# Altium PCB SPARK_Controller.PcbDoc
Units mm, origin at the board's own origin, x right, y up, seen from the top; angles counter-clockwise.
Board outline 172.59 x 104.39 mm, 2 copper layers (Top Layer, Bottom Layer); 135 components, 114 nets, 419 pads, 0 vias.
Unrouted connection lines stored in the file: 281.
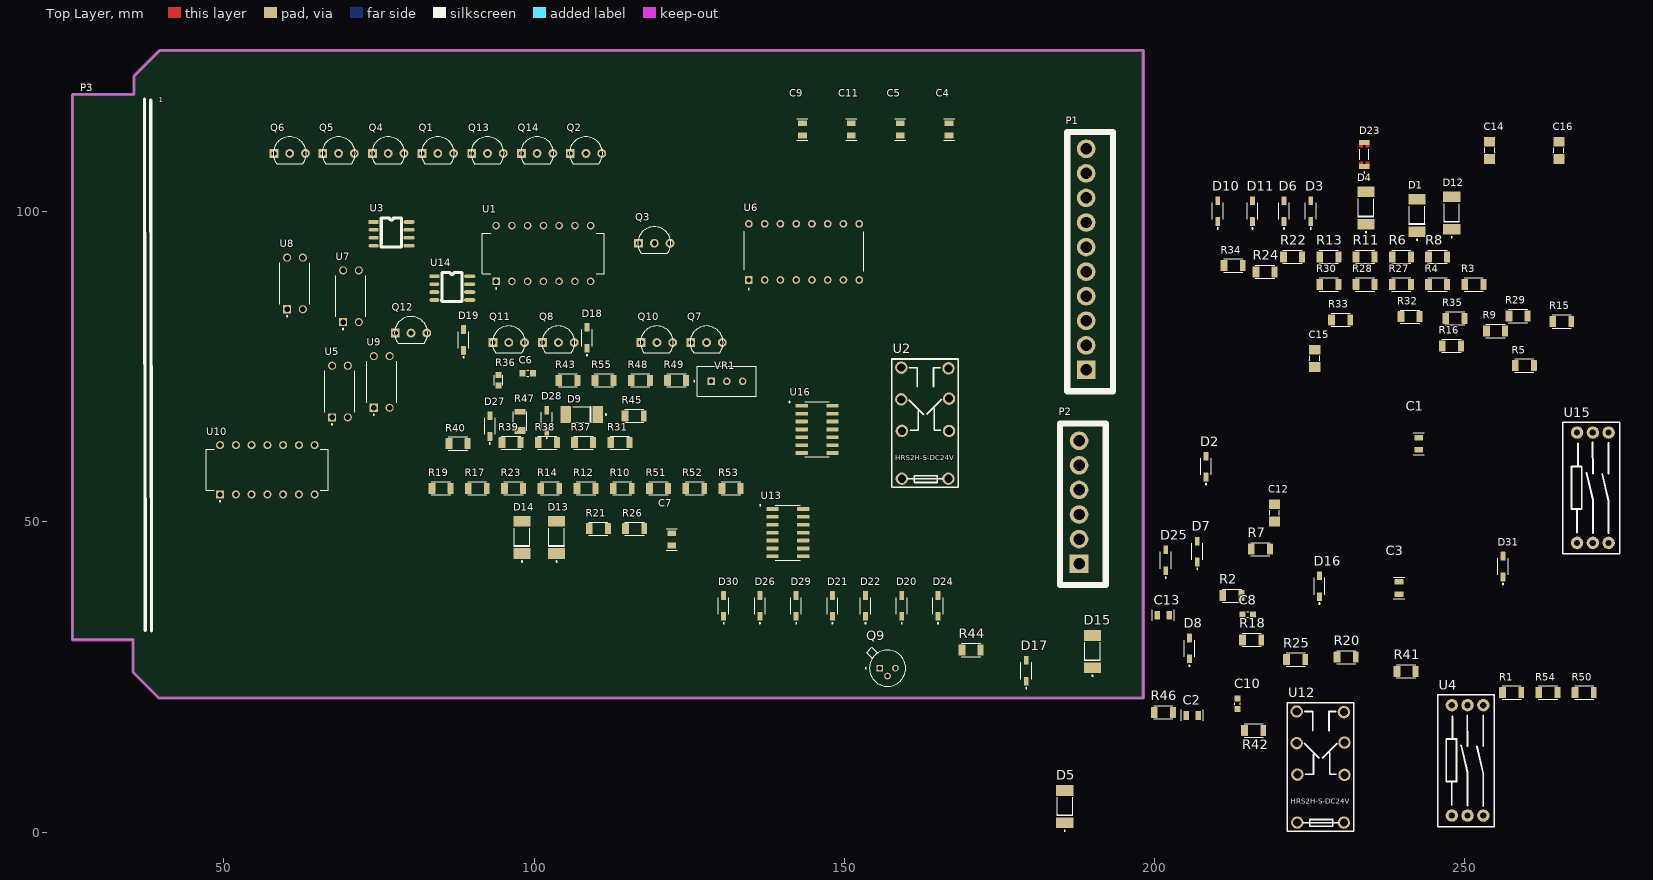
[diagram p0: Top Layer view]
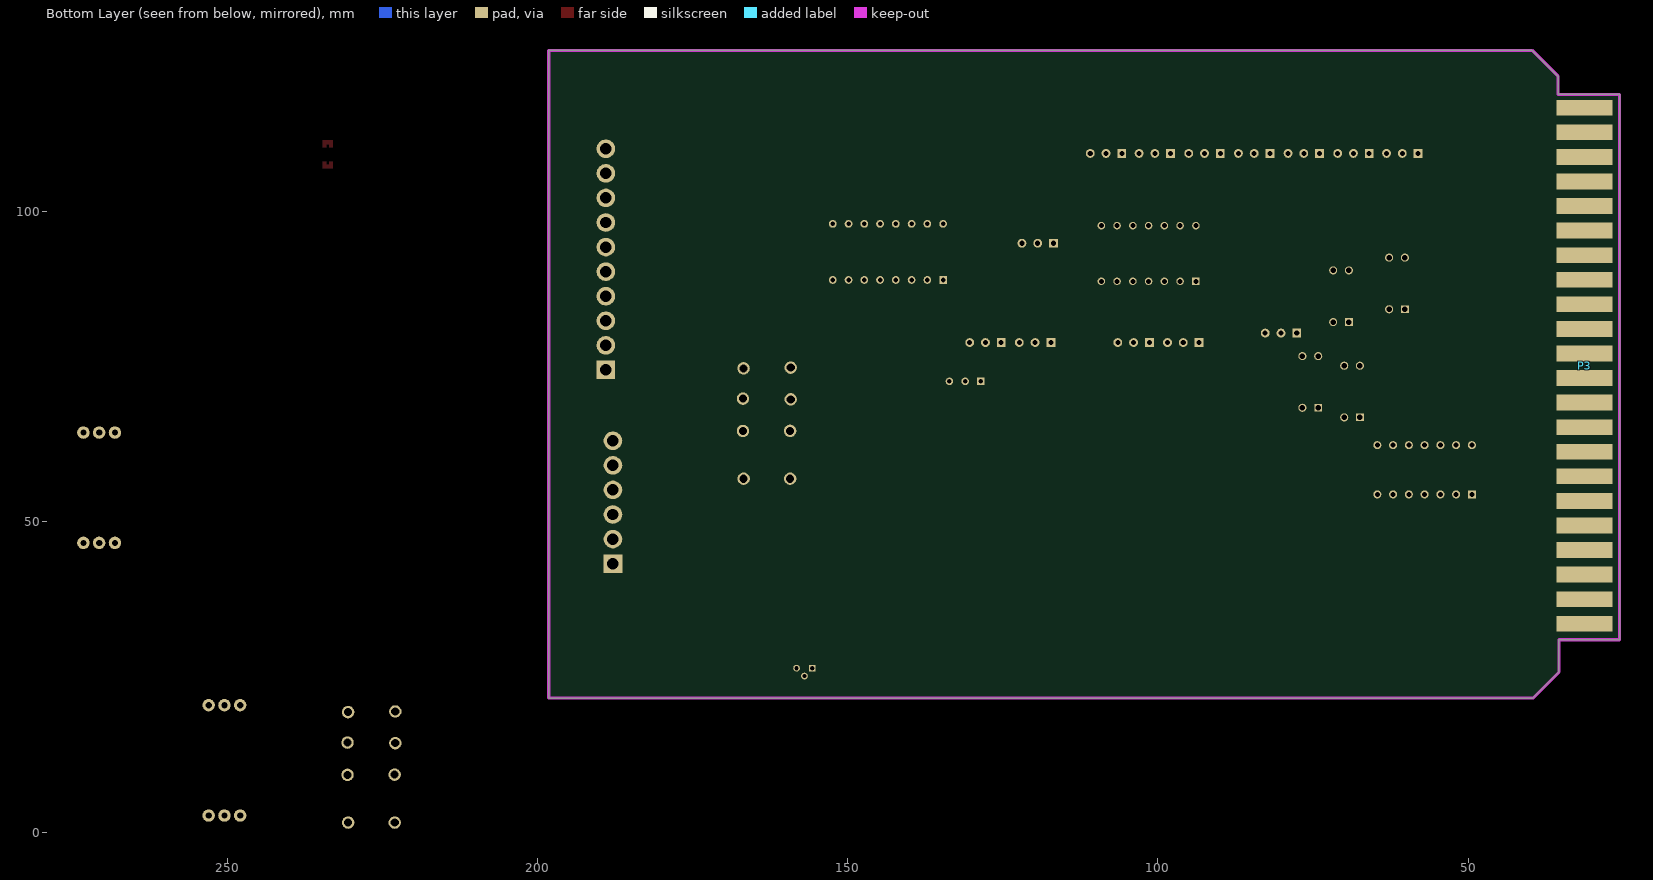
[diagram p1: Bottom Layer view, seen from below]

## Layer stack, top to bottom
Top Solder: solder mask 0.0102, Solder Resist, Dk 3.5
Top Layer: signal copper 0.0356
Dielectric 1: dielectric 0.32, FR-4, Dk 4.8
Bottom Layer: signal copper 0.0356
Bottom Solder: solder mask 0.0102, Solder Resist, Dk 3.5

## Board outline
25.59,30.988 25.59,118.872 35.496,118.872 35.496,121.793 39.688,125.984 198.183,125.984 198.183,21.59 39.56,21.59 35.369,25.781 35.369,30.988

## Design rules (kind name [scope] priority, off if disabled: settings)
Clearance [All] p1: gap=0.254 ignorepadtopadclearanceinfootprint=FALSE except(0: Arc-Hole Track-Hole SMDPad-Hole THPad-Hole Via-Hole Fill-Hole Poly-Hole Region-Hole Text-Hole)
PolygonConnect [All] p1: connectstyle=Relief reliefconductorwidth=0.254 reliefentries=4 polygonreliefangle="90 Angle" airgapwidth=0.254
RoutingVias [All] p1: holewidth=0.711 width=1.27 viastyle="Through Hole" minholewidth=0.711 minwidth=1.27 maxholewidth=0.711 maxwidth=1.27
SolderMaskExpansion [All] p1: expansion=0.102 istentingtop=FALSE
Width [All] p1: maxlimit=0.254 minlimit=0.254 preferedwidth=0.254
30 further rules are at their usual default settings.

## Components (designator, comment, footprint, x,y, rotation, side; value= is the part's Value field where it differs from the comment)
C1 "100nF" Cap0805 243.459,60.833 r90 top
C2 "100nF" Cap0805 204.343,17.907 r0 top
C3 "100nF" Cap0805 240.284,37.592 r90 top
C4 "100nF" Cap0805 167.767,111.506 r90 top
C5 "100nF" Cap0805 159.893,111.506 r90 top
C6 "10uF" Cap0603 98.97,73.942 r0 top
C7 "1nF" Cap0805 123.063,45.419 r90 top
C8 "47pF" Cap0603 215.011,35.052 r0 top
C9 "100nF" Cap0805 144.145,111.506 r90 top
C10 "22pF" Cap0603 213.36,20.701 r90 top
C11 "100nF" Cap0805 152.019,111.506 r90 top
C12 "10uF" Cap1206 219.329,51.435 r90 top
C13 "10uF" Cap0805 199.644,34.036 r0 top
C14 "10uF" Cap1206 254,109.855 r90 top
C15 "10uF" Cap1206 225.806,76.33 r90 top
C16 "10uF" Cap1206 265.176,109.855 r90 top
D1 "ZM" Melf 242.316,99.381 r90 top
D2 "1N4148" SOD-123 208.28,58.899 r90 top
D3 "1N4148" SOD-123 225.171,100.076 r90 top
D4 "ZM" Melf 234.061,100.584 r90 top
D5 "ZM" Melf 185.547,4.1 r90 top
D6 "1N4148" SOD-123 220.853,100.076 r90 top
D7 "1N4148" SOD-123 206.883,45.212 r90 top
D8 "1N4148" SOD-123 205.613,29.591 r90 top
D9 "ZM" Melf 107.696,67.31 r180 top
D10 "1N4148" SOD-123 210.185,100.076 r90 top
D11 "1N4148" SOD-123 215.773,100.076 r90 top
D12 "ZM" Melf 247.904,99.762 r90 top
D13 "ZM" Melf 103.632,47.498 r90 top
D14 "ZM" Melf 98.044,47.498 r90 top
D15 "ZM" Melf 189.992,29.083 r90 top
D16 "1N4148" SOD-123 226.568,39.624 r90 top
D17 "1N4148" SOD-123 179.324,26.006 r90 top
D18 "1N4148" SOD-123 108.524,79.657 r90 top
D19 "1N4148" SOD-123 88.646,79.305 r90 top
D20 "1N4148" SOD-123 159.258,36.449 r90 top
D21 "1N4148" SOD-123 148.082,36.449 r90 top
D22 "1N4148" SOD-123 153.416,36.449 r90 top
D23 "ZMM" MINIMELF 233.807,109.22 r90 top
D24 "1N4148" SOD-123 165.1,36.449 r90 top
D25 "1N4148" SOD-123 201.803,43.815 r90 top
D26 "1N4148" SOD-123 136.398,36.449 r90 top
D27 "1N4148" SOD-123 92.874,65.433 r90 top
D28 "1N4148" SOD-123 102.047,66.322 r90 top
D29 "1N4148" SOD-123 142.24,36.449 r90 top
D30 "1N4148" SOD-123 130.556,36.449 r90 top
D31 "1N4148" SOD-123 256.159,42.799 r90 top
P1 "PWR_HDR_10P" PWR_HDR_10P 188.976,74.48 r90 top
P2 "PWR_HDR_6P" PWR_HDR_6P 187.833,43.261 r90 top
P3 "PCI" PCI 31.242,116.735 r0 top
Q1 "BC337" TO92 84.492,109.375 r0 top
Q2 "BC337" TO92 108.368,109.375 r0 top
Q3 "BC337" TO92 119.38,94.897 r0 top
Q4 "BC337" TO92 76.491,109.375 r0 top
Q5 "BC337" TO92 68.49,109.375 r0 top
Q6 "BC337" TO92 60.616,109.375 r0 top
Q7 "BC337" TO92 127.799,78.895 r0 top
Q8 "BC337" TO92 103.923,78.895 r0 top
Q9 "BC177" TO-18 156.972,26.416 r0 top
Q10 "BC337" TO92 119.798,78.895 r0 top
Q11 "BC337" TO92 95.922,78.895 r0 top
Q12 "BC337" TO92 80.17,80.419 r0 top
Q13 "BC337" TO92 92.493,109.375 r0 top
Q14 "BC337" TO92 100.494,109.375 r0 top
R1 "4.7K" Res1206 257.556,22.479 r0 top value=1K
R2 "1.2K" Res1206 212.471,38.1 r0 top value=1K
R3 "4.7K" Res1206 251.46,88.265 r0 top value=1K
R4 "4.7K" Res1206 245.618,88.265 r0 top value=1K
R5 "6K8" Res1206 259.588,75.184 r0 top value=1K
R6 "330K" Res1206 239.776,92.71 r0 top value=1K
R7 "100K" Res1206 217.043,45.593 r0 top value=1K
R8 "3.9K" Res1206 245.618,92.71 r0 top value=1K
R9 "180K" Res1206 254.957,80.772 r0 top value=1K
R10 "10K" Res1206 114.21,55.4 r0 top value=1K
R11 "3.9K" Res1206 233.934,92.71 r0 top value=1K
R12 "10K" Res1206 108.368,55.4 r0 top value=1K
R13 "165k" Res1206 228.092,92.71 r0 top value=1K
R14 "10K" Res1206 102.526,55.4 r0 top value=1K
R15 "8.2k" Res1206 265.625,82.296 r0 top value=1K
R16 "6K8" Res1206 247.845,78.359 r0 top value=1K
R17 "10K" Res1206 90.842,55.4 r0 top value=1K
R18 "1.2K" Res1206 215.646,30.988 r0 top value=1K
R19 "10K" Res1206 85,55.4 r0 top value=1K
R20 "1k" Res1206 230.886,28.194 r0 top value=1K
R21 "27K" Res1206 110.363,48.895 r0 top value=1K
R22 "1k" Res1206 222.25,92.71 r0 top value=1K
R23 "10K" Res1206 96.684,55.4 r0 top value=1K
R24 "8.2k" Res1206 217.805,90.297 r0 top value=1K
R25 "1K8" Res1206 222.742,27.813 r0 top value=1K
R26 "1K8" Res1206 116.205,48.895 r0 top value=1K
R27 "33K" Res1206 239.776,88.265 r0 top value=1K
R28 "2K2" Res1206 233.934,88.265 r0 top value=1K
R29 "47k" Res1206 258.572,83.185 r0 top value=1K
R30 "2k7" Res1206 228.092,88.265 r0 top value=1K
R31 "1K5" Res1206 113.825,62.766 r0 top value=1K
R32 "47k" Res1206 241.173,83.058 r0 top value=1K
R33 "56k" Res1206 229.997,82.55 r0 top value=1K
R34 "18k" Res1206 212.666,91.313 r0 top value=1K
R35 "18k" Res1206 248.412,82.804 r0 top value=1K
R36 "100K" Res0603 94.271,72.799 r90 top value=1K
R37 "1K5" Res1206 107.983,62.766 r0 top value=1K
R38 "1K5" Res1206 102.141,62.766 r0 top value=1K
R39 "1K5" Res1206 96.299,62.766 r0 top value=1K
R40 "1K5" Res1206 87.757,62.611 r0 top value=1K
R41 "15k" Res1206 240.538,25.908 r0 top value=1K
R42 "1k" Res1206 215.968,16.383 r0 top value=1K
R43 "10K" Res1206 105.447,72.799 r0 top value=1K
R44 "100K" Res1206 170.434,29.337 r0 top value=1K
R45 "10K" Res1206 116.128,67.084 r0 top value=1K
R46 "22K" Res1206 201.422,19.304 r0 top value=1K
R47 "10K" Res1206 97.729,66.195 r90 top value=1K
R48 "10K" Res1206 117.131,72.799 r0 top value=1K
R49 "10K" Res1206 122.973,72.799 r0 top value=1K
R50 "4.7K" Res1206 269.24,22.479 r0 top value=1K
R51 "10K" Res1206 120.052,55.4 r0 top value=1K
R52 "10K" Res1206 125.894,55.4 r0 top value=1K
R53 "10K" Res1206 131.736,55.4 r0 top value=1K
R54 "390R" Res1206 263.398,22.479 r0 top value=1K
R55 "10K" Res1206 111.289,72.799 r0 top value=1K
U1 "HCF4093BE" HCF4093BE 101.506,93.246 r90 top
U2 "HRS2H-S-DC24V" HRS2H-S-DC24V 163.029,65.899 r90 top
U3 "OP07CD" SOP8 76.995,96.421 r0 top
U4 "OL-C-212H" ol-c-212H 247.904,2.667 r90 top
U5 "TLP521-1" TLP521-1 68.707,70.993 r90 top
U6 "CD4049UBE" PDIP-16 143.51,93.5 r90 top
U7 "TLP521-1" TLP521-1 70.485,86.36 r90 top
U8 "TLP521-1" TLP521-1 61.468,88.42 r90 top
U9 "TLP521-1" TLP521-1 75.438,72.545 r90 top
U10 "CD4011BE" PDIP-14 57.023,58.387 r90 top
U12 "HRS2H-S-DC24V" HRS2H-S-DC24V 226.762,10.484 r90 top
U13 "HEF4066BT" SOIC-14 140.908,48.26 r0 top
U14 "NE555D" SOP8 86.774,87.658 r0 top
U15 "OL-C-212H" ol-c-212H 268.097,46.609 r90 top
U16 "NE556D" SOIC-14 145.607,64.897 r0 top
VR1 "10K" Multi_Turn 131.064,72.644 r0 top

## Footprints (in the part's own frame and the unit in brackets; to place one, negate y for a bottom-side part, rotate by r counter-clockwise, add the part's x,y. Pads: shape width x height; smd on the part's side, far side on the other; paste and mask are expansions set on the pad)
Cap0603 [mm]
  rect 1x1 smd: 1(-0.85,0) 2(0.85,0)
  silkscreen extent -0.15,-0.45 0.15,0.45, body extent -0.8,-0.45 0.8,0.45, height 0.8
Cap0805 [mm]
  rect 0.9x1.4 smd: 1(0.762,0.889) 2(2.73,0.889)
  silkscreen extent 0,0 3.49,1.78, body extent 0.74,0.26 2.74,1.51, height 0.81
Cap1206 [mm]
  rect 1.6x1.8 smd: 1(-1.4,0) 2(1.4,0)
  silkscreen extent -0.4,-0.8 0.4,0.8, body extent -1.6,-0.8 1.6,0.8, height 0.94
HCF4093BE [mm]
  rect 1.2x1.2 hole 0.8: 1(-4.478,7.62)
  round 1.2 hole 0.8: 2(-4.478,5.08) 3(-4.478,2.54) 4(-4.478,0) 5(-4.478,-2.54) 6(-4.478,-5.08) 7(-4.478,-7.62) 8(4.478,-7.62) 9(4.478,-5.08) 10(4.478,-2.54) 11(4.478,0) 12(4.478,2.54) 13(4.478,5.08) 14(4.478,7.62)
  silkscreen extent -5.74,-9.84 3.3,9.84, body extent -5.51,-9.7 5.41,9.6, height 5.08
HRS2H-S-DC24V [mm]
  round 2 hole 1.3 paste+0 mask+0.051: 1(-8.952,-3.74) 2(-1.256,-3.849) 3(3.943,-3.849) 4(8.846,-3.75) 5(8.952,3.847) 6(3.844,3.849) 7(-1.236,3.75) 8(-8.952,3.76)
  silkscreen extent -10.36,-5.35 10.34,5.35
Melf [mm]
  rect 1.7x2.78 smd: A(2.6,0) C(-2.6,0)
  silkscreen extent -4,-1.23 1.5,1.23, body extent -2.7,-1.27 2.45,1.4, height 1.34
MINIMELF [mm]
  rect 0.8x1.65 smd: A(1.95,0) C(-1.95,0)
  Top Layer region: -1.15,0.25 -1.65,0.25 -1.65,-0.25 -1.15,-0.25 -1.15,-0.825 -2.24,-0.825 -2.24,0.825 -1.15,0.825
  Top Layer region: 2.25,-0.825 1.15,-0.825 1.15,-0.25 1.65,-0.25 1.65,0.25 1.15,0.25 1.15,0.825 2.25,0.825
  silkscreen extent -3.02,-0.75 0.83,0.75, body extent -1.73,-0.75 1.73,0.75, height 1.5
Multi_Turn [mm]
  rect 1.218x1.218 / inner round 1.218 / far side rect 1.218x1.218 hole 0.71: 1(-2.54,0)
  round 1.218 hole 0.71: 2(0,0) 3(2.54,0)
  silkscreen extent -5.35,-2.41 4.76,2.42, body extent -4.76,-2.41 4.76,2.42, height 11.55
ol-c-212H [mm]
  round 2 hole 1: 1(0,0) 2(17.78,0) 3(0,-2.54) 4(17.78,-2.54) 5(0,-5.08) 6(17.78,-5.08)
  silkscreen extent -1.78,-6.86 19.43,2.29
PCI [mm]
  rect 9x2.54 smd far side: 1(0,0) 2(0,-3.96) 3(0,-7.92) 4(0,-11.88) 5(0,-15.84) 6(0,-19.8) 7(0,-23.76) 8(0,-27.72) 9(0,-31.68) 10(0,-35.64) 11(0,-39.6) 12(0,-43.56) 13(0,-47.52) 14(0,-51.48) 15(0,-55.44) 16(0,-59.4) 17(0,-63.36) 18(0,-67.32) 19(0,-71.28) 20(0,-75.24) 21(0,-79.2) 22(0,-83.16)
  silkscreen extent 5.97,-84.33 7.11,1.4
PDIP-14 [mm]
  rect 1.3x1.3 hole 0.8: 1(-3.97,7.62)
  round 1.3 hole 0.8: 2(-3.97,5.08) 3(-3.97,2.54) 4(-3.97,0) 5(-3.97,-2.54) 6(-3.97,-5.08) 7(-3.97,-7.62) 8(3.97,-7.62) 9(3.97,-5.08) 10(3.97,-2.54) 11(3.97,0) 12(3.97,2.54) 13(3.97,5.08) 14(3.97,7.62)
  silkscreen extent -5.15,-9.84 3.3,9.84, body extent -4.13,-9.65 4.06,9.65, height 5.08
PDIP-16 [mm]
  rect 1.248x1.248 hole 0.74: 1(-4.52,8.89)
  round 1.248 hole 0.74: 2(-4.52,6.35) 3(-4.52,3.81) 4(-4.52,1.27) 5(-4.52,-1.27) 6(-4.52,-3.81) 7(-4.52,-6.35) 8(-4.52,-8.89) 9(4.52,-8.89) 10(4.52,-6.35) 11(4.52,-3.81) 12(4.52,-1.27) 13(4.52,1.27) 14(4.52,3.81) 15(4.52,6.35) 16(4.52,8.89)
  silkscreen extent -6.08,-9.65 3.32,9.65, body extent -5.42,-9.65 5.5,9.65, height 5.08
PWR_HDR_6P [mm]
  rect 3x3 hole 1.85: 1(0,0)
  round 3 hole 1.85: 2(3.96,0) 3(7.92,0) 4(11.88,0) 5(15.84,0) 6(19.8,0)
  silkscreen extent -3.43,-4.32 22.61,3.05
PWR_HDR_10P [mm]
  rect 3x3 hole 1.85: 1(0,0)
  round 3 hole 1.85: 2(3.96,0) 3(7.92,0) 4(11.88,0) 5(15.84,0) 6(19.8,0) 7(23.76,0) 8(27.72,0) 9(31.68,0) 10(35.64,0)
  silkscreen extent -3.43,-4.32 38.35,3.05
Res0603 [mm] "CHIP Resistor 1/10 WATT, 1.6x0.8mm, 0603, SMD (SolderMask Defined)"
  rrect20% 1x1.02 smd: 1(-0.85,0) 2(0.85,0)
  silkscreen extent -0.8,-0.69 0.8,0.69, body extent -0.85,-0.4 0.85,0.4, height 0.56
Res1206 [mm]
  rrect14% 1.09x1.77 smd: 1(-1.465,0)
  rrect14% 0.94x1.77 smd: 2(1.54,0)
  silkscreen extent -1.55,-1.06 1.55,1.06, body extent -1.6,-0.8 1.6,0.8, height 0.6
SOD-123 [mm]
  rrect18% 1.4x0.8 smd: A(1.68,0) C(-1.68,0)
  silkscreen extent -2.9,-0.85 1.35,0.85, body extent -1.82,-0.65 1.82,0.9, height 1.44
SOIC-14 [mm]
  rrect25% 1.97x0.6 smd: 1(-2.475,3.81) 2(-2.475,2.54) 3(-2.475,1.27) 4(-2.475,0) 5(-2.475,-1.27) 6(-2.475,-2.54) 7(-2.475,-3.81) 8(2.475,-3.81) 9(2.475,-2.54) 10(2.475,-1.27) 11(2.475,0) 12(2.475,1.27) 13(2.475,2.54) 14(2.475,3.81)
  silkscreen extent -4.54,-4.43 2,4.51, body extent -2.87,-4.28 3.13,4.28, height 1.8
SOP8 [mm]
  rect 1.6x0.6 smd: 1(-2.85,1.905)
  oval 1.6x0.6 smd: 2(-2.85,0.635) 3(-2.85,-0.635) 4(-2.85,-1.905)
  oval 1.8x0.6 smd: 5(2.85,-1.905) 6(2.85,-0.635) 7(2.85,0.635) 8(2.85,1.905)
  silkscreen extent -1.65,-2.13 1.63,2.54, body extent -2.98,-2.5 3.02,2.4, height 1.7
TLP521-1 [mm]
  rect 1.3x1.3 / inner round 1.24 / far side rect 1.24x1.24 hole 0.89: 1(-4.163,1.27)
  round 1.3 hole 0.89: 2(-4.163,-1.27) 3(4.163,-1.27) 4(4.163,1.27)
  silkscreen extent -5.38,-2.41 3.32,2.41, body extent -4.29,-2.29 4.29,2.29, height 4.85
TO92 [mil]
  rect 56x56 / inner round 56 / far side rect 56x56 hole 32: 1(-100,0)
  round 56 hole 32: 2(0,0) 3(100,0)
  silkscreen extent -105,-65 105,105, body extent -102,-58 102,107, height 210
TO-18 [mm]
  rect 1.08x1.08 / inner round 1.08 / far side rect 1.08x1.08 hole 0.68: 1(-1.27,0)
  round 1.08 hole 0.68: 2(0,-1.27) 3(1.27,0)
  silkscreen extent -3.6,-2.92 2.92,3.34, body extent -3.27,-2.9 2.9,3.27, height 10.38

## Part data
C1 C3 C4 C5 C9 C11: library part Cap-0805-100nF, "Cap 0805 100nF", Manufacturer=---, Adding Time=1402-05-18, Additionner=S.Pourmohammad, Category=Cap, Datasheet Path=---, ID=51, Part Number=Cap-0805-100nF, Sub-Category=Cer0805, Supplier="Ic Kala"
C2: library part C0805C104K5RACAUTO, "Multilayer Ceramic Capacitors MLCC - SMD 50V 100nF X7R 0805 10% AEC-Q200", Manufacturer=KEMET, Adding Time=1400-09-09, Additionner=M.Moghimi, Category=Cap, Datasheet Path="Datasheets\KEM_C1002_X7R_SMD Capacitor Series.pdf", ID=11, Part Number=C0805C104K5RACAUTO, Sub-Category=Cer0805
C6: library part Cap-0603-10uF, "Cap 0603 10uF", Manufacturer=---, Adding Time=1401-05-17, Additionner=A.Abdolahzadeh, Category=Cap, Datasheet Path=---, ID=40, Part Number=Cap-0603-10uF, Sub-Category=Cer0603
C7: library part Cap-0805-1nF, "Cap 0805 1nF", Manufacturer=---, Adding Time=1402-05-18, Additionner=S.Pourmohammad, Category=Cap, Datasheet Path=---, ID=116, Part Number=Cap-0805-1nF, Sub-Category=Cer0805, Supplier="Ic Kala"
C8: library part Cap-0603-47pF, "Cap 0603 47pF", Manufacturer=---, Adding Time=1402-09-24, Additionner=A.Abdolahzadeh, Category=Cap, Datasheet Path=---, ID=0, Part Number=Cap-0603-47pF, Sub-Category=Cer0603
C10: library part Cap-0603-22pF, "Cap 0603 22pF", Manufacturer=---, Adding Time=1401-04-30, Additionner=A.Abdolahzadeh, Category=Cap, Datasheet Path=---, ID=114, Part Number=Cap-0603-22pF, Sub-Category=Cer0603, Supplier="Ic Kala"
C12 C14 C15 C16: library part Cap-1206-10uF, "Cap 1206 10uF 50V", Manufacturer=---, Adding Time=1401-06-09, Additionner=S.Pourmohammad, Category=Cap, Datasheet Path=---, ID=48, Part Number=Cap-1206-10uF, Sub-Category=Cer1206, Supplier="Ic Kala"
C13: library part Cap-0805-10uF, "Cap 0805 10uF", Manufacturer=---, Adding Time=1401-05-17, Additionner=S.Pourmohammad, Category=Cap, Datasheet Path=---, ID=49, Part Number=Cap-0805-10uF, Sub-Category=Cer0805, Supplier="Ic Kala"
D1 D4 D5 D9 D12 D13 D14 D15: "Zener Diode Melf", Package="DO-213 STMicroelectronics", Additionner=S.Pourmohammad, Availability="Not in stock", Category=Diode, Check_prices=https://www.snapeda.com/parts/TMMBAT41/STMicroelectronics/view-part/2894620/?ref=eda, ID=132, MF=STMicroelectronics, MP=TMMBAT41, Part Number=ZM, Price=None, SnapEDA_Link=https://www.snapeda.com/parts/TMMBAT41/STMicroelectronics/view-part/2894620/?ref=snap, Sub-Category=Zener
D2 D3 D6 D7 D8 D10 D11 D16 D17 D18 D19 D20 D21 D22 D24 D25 D26 D27 D28 D29 D30 D31: "Diode Standard 75 V 300mA (DC) Through Hole DO-35 Mimi Melf", Package="AXIAL LEAD-2 ON Semiconductor", Adding Time=1402-10-1, Additionner=S.Pourmohammad, Availability="In Stock", Category=Diode, Check_prices=https://www.snapeda.com/parts/1N4148/Onsemi/view-part/?ref=eda, ID=113, MF="ON Semiconductor", MP=1N4148, Part Number=1N4148, Price=None, Purchase-URL=https://pricing.snapeda.com/search/part/1N4148/?ref=eda, SnapEDA_Link=https://www.snapeda.com/parts/1N4148/Onsemi/view-part/?ref=snap, Sub-Category=standard
D23: "Zener Diode MiniMelf", Package="DO-213 STMicroelectronics", Additionner=S.Pourmohammad, Availability="Not in stock", Category=Diode, Check_prices=https://www.snapeda.com/parts/TMMBAT41/STMicroelectronics/view-part/2894620/?ref=eda, ID=131, MF=STMicroelectronics, MP=TMMBAT41, Part Number=ZMM, Price=None, SnapEDA_Link=https://www.snapeda.com/parts/TMMBAT41/STMicroelectronics/view-part/2894620/?ref=snap, Sub-Category=Zener
P1: library part "Power Connector 10 Pin", "P-P= 3.96mm", Adding Time=1402-10-1, Additionner=S.Pourmohammad, Category=Connector, ID=101, Part Number="Power Connector 10 Pin", Sub-Category="Power Connector"
P2: library part "Power Connector 6 Pin", "P-P= 3.96mm", Adding Time=1402-10-1, Additionner=S.Pourmohammad, Category=Connector, ID=100, Part Number="Power Connector 6 Pin", Sub-Category="Power Connector"
P3: "normal PAD for SPARK project", Adding Time=1402-10-1, Additionner=S.Pourmohammad, Category=Connector, ID=81, Part Number=PCI, Sub-Category=PCI
Q1 Q2 Q3 Q4 Q5 Q6 Q7 Q8 Q10 Q11 Q12 Q13 Q14: "Transistor", Manufacturer=Diodes-Incorporated, Adding Time=1402-10-1, Additionner=S.Pourmohammad, Category=Transistor, ID=118, Part Number=BC337, Sub-Category=BJT-NPN, Supplier="Ic Kala"
Q9: Manufacturer=---, Package="SOT-89-3 Nexperia", Adding Time=1402-09-26, Additionner=A.Abdolahzadeh, Availability=Unavailable, Category=Transistor, Datasheet Path=---, ID=133, MF="Nexperia USA", MP=BCX53-16,115, Part Number=BC177, Price=None, SnapEDA_Link=https://www.snapeda.com/parts/BCX53-16,115/Nexperia%20USA%20Inc./view-part/1098173/?ref=snap, Sub-Category=BJT-PNP
R1 R3 R4 R50: library part Res-1206-4.7k, Manufacturer=---, Adding Time=1402-09-24, Additionner=A.Abdolahzadeh, Category=Res, Datasheet Path=---, ID=95, Part Number=Res-1206-4.7k, Sub-Category=SMD-1206
R2 R18: library part Res-1206-1.2k, Manufacturer=---, Adding Time=1402-09-24, Additionner=A.Abdolahzadeh, Category=Res, Datasheet Path=---, ID=92, Part Number=Res-1206-1.2k, Sub-Category=SMD-1206
R5 R16: library part Res-1206-6K8, "Resistor 1206 6.8 Kohm", Adding Time=1402-10-1, Additionner=S.Pourmohammad, Category=Res, ID=67, Part Number=Res-1206-6K8, Sub-Category=SMD-1206, Supplier="Ic Kala"
R6: library part Res-1206-330K, Manufacturer=---, Adding Time=1402-09-24, Additionner=A.Abdolahzadeh, Category=Res, Datasheet Path=---, ID=91, Part Number=Res-1206-330K, Sub-Category=SMD-1206
R7 R44: library part Res-1206-100k, Manufacturer=---, Part Number=Res-1206-100K, Adding Time=1402-09-24, Additionner=A.Abdolahzadeh, Category=Res, Datasheet Path=---, ID=96, Sub-Category=SMD-1206
R8 R11: library part Res-1206-3.9k, Manufacturer=---, Adding Time=1402-09-24, Additionner=A.Abdolahzadeh, Category=Res, Datasheet Path=---, ID=94, Part Number=Res-1206-3.9k, Sub-Category=SMD-1206
R9: library part Res-1206-180k, Manufacturer=---, Adding Time=1402-09-24, Additionner=A.Abdolahzadeh, Category=Res, Datasheet Path=---, ID=93, Part Number=Res-1206-180k, Sub-Category=SMD-1206
R10 R12 R14 R17 R19 R23 R43 R45 R47 R48 R49 R51 R52 R53 R55: library part Res-1206-10K, "Resistor 1206 10 Kohm", Manufacturer=---, Adding Time=1402-10-1, Additionner=S.Pourmohammad, Category=Res, Datasheet Path=---, ID=66, Part Number=Res-1206-10K, Sub-Category=SMD-1206, Supplier="Ic Kala"
R13: library part Res-1206-165K, Manufacturer=---, Adding Time=1402-09-26, Additionner=A.Abdolahzadeh, Category=Res, Datasheet Path=---, ID=111, Part Number=Res-1206-165K
R15 R24: library part Res-1206-8.2K, Manufacturer=---, Adding Time=1402-09-26, Additionner=A.Abdolahzadeh, Category=Res, Datasheet Path=---, ID=112, Part Number=Res-1206-8.2K
R20 R22 R42: library part Res-1206-1K, Manufacturer=---, Adding Time=1402-09-26, Additionner=A.Abdolahzadeh, Category=Res, Datasheet Path=---, ID=88, Part Number=Res-1206-1K
R21: library part Res-1206-27K, "Resistor 1206 27 Kohm", Adding Time=1402-10-1, Additionner=S.Pourmohammad, Category=Res, ID=70, Part Number=Res-1206-27K, Sub-Category=SMD-1206, Supplier="Ic Kala"
R25 R26: library part Res-1206-1K8, "Resistor 1206 1.8 Kohm", Adding Time=1402-10-1, Additionner=S.Pourmohammad, Category=Res, ID=102, Part Number=Res-1206-1K8, Sub-Category=SMD-1206, Supplier="Ic Kala"
R27: library part Res-1206-33K, "Resistor 1206 33 Kohm", Adding Time=1402-10-1, Additionner=S.Pourmohammad, Category=Res, ID=71, Part Number=Res-1206-33K, Sub-Category=SMD-1206, Supplier="Ic Kala"
R28: library part Res-1206-2K2, "Resistor 1206 2.2 Kohm", Adding Time=1402-10-1, Additionner=S.Pourmohammad, Category=Res, ID=82, Part Number=Res-1206-2K2, Sub-Category=SMD-1206, Supplier="Ic Kala"
R29 R32: library part Res-1206-47K, Manufacturer=---, Adding Time=1402-09-26, Additionner=A.Abdolahzadeh, Category=Res, Datasheet Path=---, ID=109, Part Number=Res-1206-47K
R30: library part Res-1206-2K7, Manufacturer=---, Adding Time=1402-09-26, Additionner=A.Abdolahzadeh, Category=Res, Datasheet Path=---, ID=110, Part Number=Res-1206-2K7
R31 R37 R38 R39 R40: library part Res-1206-1K5, "Resistor 1206 1.5 Kohm", Adding Time=1402-10-1, Additionner=S.Pourmohammad, Category=Res, ID=99, Part Number=Res-1206-1K5, Sub-Category=SMD-1206, Supplier="Ic Kala"
R33: library part Res-1206-56K, Manufacturer=---, Adding Time=1402-09-26, Additionner=A.Abdolahzadeh, Category=Res, Datasheet Path=---, ID=107, Part Number=Res-1206-56K
R34 R35: library part Res-1206-18K, Manufacturer=---, Adding Time=1402-09-26, Additionner=A.Abdolahzadeh, Category=Res, Datasheet Path=---, ID=108, Part Number=Res-1206-18K
R36: library part Res-0603-100K, "Resistor 0603 100K ohm", Manufacturer=---, Adding Time=1401-04-24, Additionner=A.Abdolahzadeh, Category=Res, Datasheet Path=---, ID=11, Part Number=Res-0603-100K, Sub-Category=SMD-0603, Supplier="Ic Kala"
R41: library part Res-1206-15k, Manufacturer=---, Adding Time=1402-09-24, Additionner=A.Abdolahzadeh, Category=Res, Datasheet Path=---, ID=98, Part Number=Res-1206-15k, Sub-Category=SMD-1206
R46: library part Res-1206-22K, "Resistor 1206 22 Kohm", Adding Time=1402-10-1, Additionner=S.Pourmohammad, Category=Res, ID=69, Part Number=Res-1206-22K, Sub-Category=SMD-1206, Supplier="Ic Kala"
R54: library part Res-1206-390R, Manufacturer=---, Adding Time=1402-09-26, Additionner=A.Abdolahzadeh, Category=Res, Datasheet Path=---, ID=106, Part Number=Res-1206-390R
U1: "2 input NAND schmitt trigger with 4 channel", Manufacturer=ST, Adding Time=1402-9-24, Additionner=A.Abdolahzadeh, Category=Logic-IC, Datasheet Path=Datasheets\HCF4093BE.pdf, ID=100, Part Number=HCF4093BE, Sub-Category=NAND
U2 U12: "Relay with 2 contact and 24VDC with 1A current", JLCPCB Part Class="Extended Part", Manufacturer=HUIGANG, Adding Time=1402-9-24, Additionner=S.Pourmohammad, Category=Relay, Datasheet Path=Datasheets\HRS2H-S-DC24v-h.pdf, ID=121, Manufacturer Part=HRS2H-S-DC24V, Part Number=HRS2H-S-DC24V, spicePre=K, spiceSymbolName=HRS2H-S-DC24V, Sub-Category=2Contact, Supplier=LCSC, Supplier Part=C12249
U3: "Low-Offset voltage (0.25mV) single operational amplifier 8-SOIC 0 to 70", Manufacturer="Analog Device", Package="SOIC-8 Texas Instruments", Adding Time=1402-09-26, Additionner=A.Abdolahzadeh, Availability=Unavailable, Category=OpAmp, Datasheet Path=Datasheets\OP07.pdf, ID=105, MF="Texas Instruments", MP=OP07CD, Part Number=OP07CD, Price=None, Purchase-URL=https://pricing.snapeda.com/search/part/OP07CD/?ref=eda, SnapEDA_Link=https://www.snapeda.com/parts/OP07CD/Texas%20Instruments/view-part/516771/?ref=snap, Sub-Category="1 channel"
U4 U15: "REED RELAY  2 Contact", Adding Time=1402-10-1, Additionner=S.Pourmohammad, Category=Relay, ID=130, Part Number=OL-C-212H, Sub-Category="RELAY REED SPDT", Supplier=……..
U5 U7 U8 U9: "typical Optocoupler with 1 channel and DIP", Manufacturer=TOSHIBA, Adding Time=1402-09-27, Additionner=A.Abdolahzadeh, Category=Optocoupler, Datasheet Path=Datasheets\TLP521.pdf, ID=125, Part Number=TLP521-1, Sub-Category=DIP
U6: "6-ch, 3-V to 18-V inverters", Manufacturer="Texas Instrument", Adding Time=1402-09-27, Additionner=A.Abdolahzadeh, Category=Logic-IC, Datasheet Path=Datasheets\cd4049ub.pdf, ID=127, Part Number=CD4049UBE, Sub-Category=NOT
U10: "4 channel CMOS NAND Gate with 2 input", Manufacturer="Texas Instrument", Package=None, Adding Time=1402-09-27, Additionner=A.Abdolahzadeh, Availability=Unavailable, Category=Logic-IC, Datasheet Path=Datasheets\CD4011BE.pdf, ID=126, MP=CD4011BE, Part Number=CD4011BE, Price=None, Sub-Category=NAND
U13: "4 Channel Circuit Analog IC Switch 1:1 with Enable", Manufacturer=Nexperia, Package="SO-14 NXP Semiconductors", Adding Time=1402-09-27, Additionner=A.Abdolahzadeh, Availability=Unavailable, Category=Switch, Datasheet Path=Datasheets\HEF4066B-2938016.pdf, ID=129, MF="NXP Semiconductors", MP=HEF4066BT, Part Number=HEF4066BT, Price=None, SnapEDA_Link=https://www.snapeda.com/parts/HEF4066BT/NXP%20Semiconductors/view-part/4303716/?ref=snap, Sub-Category=IC
U14: "555 Type, Timer/Oscillator (Single) IC 500kHz 8-SOIC", Manufacturer=ST, Package="SOIC-8 Texas Instruments", Adding Time=1402-09-26, Additionner=A.Abdolahzadeh, Availability="In Stock", Category=Logic-IC, Check_prices=https://www.snapeda.com/parts/NE555D/STMicroelectronics/view-part/?ref=eda, Datasheet Path=Datasheets\NE555.pdf, ID=104, MF=STMicroelectronics, MP=NE555D, Part Number=NE555D, Price=None, Purchase-URL=https://pricing.snapeda.com/search/part/NE555D/?ref=eda, SnapEDA_Link=https://www.snapeda.com/parts/NE555D/STMicroelectronics/view-part/?ref=snap, Sub-Category=Timer
U16: "Dual 555 Timer 500kHz", Manufacturer=ST, Package="SOIC-14 Texas Instruments", Adding Time=1402-09-27, Additionner=A.Abdolahzadeh, Availability=Unavailable, Category=Logic-IC, Datasheet Path=Datasheets\NE556D.pdf, ID=128, MF=STMicroelectronics, MP=NE556D, Part Number=NE556D, Price=None, SnapEDA_Link=https://www.snapeda.com/parts/NE556D/STMicroelectronics/view-part/12906/?ref=snap, Sub-Category=Timer
VR1: library part "Res Variable", "Resistor Variable Multi turn", Package="SOT-23-5 Bourns", Adding Time=1402-09-26, Additionner=S.Pourmohammad, Availability="Not in stock", Category=Res, Check_prices=https://www.snapeda.com/parts/3296W-OT1-204/Bourns/view-part/?ref=eda, ID=113, MF=Bourns, MP=3296W-OT1-204, Part Number="Res Variable", Price=None, SnapEDA_Link=https://www.snapeda.com/parts/3296W-OT1-204/Bourns/view-part/?ref=snap

## Nets (pads, with @x,y where several pads share a name; then routed paths per layer and width w, separated by ;. In a path a pad name is that pad's centre, name@x,y a point inside that pad or via, vN(x,y) a via of type N, cw(c..) or ccw(c..) an arc to the next point about the centre after c; other vN are vias at no path point)
555Out: D26.A U6.5 U6.14 U14.3
556AOut: U6.11 U10.2 U10.12 U10.13 U13.13 U16.5
556BOut: U6.9 U16.9
IO_01: P2.1
IO_02: P2.2 R52.2
IO_03: P2.3
IO_04: P2.4 R41.2 U12.1 U12.5
IO_05: P2.5 U13.1 U13.3
IO_06: P2.6 R46.1
IO_07: P1.1 R44.1
IO_08: P1.2 U15.4
IO_09: P1.3
IO_10: P1.4 U15.5
IO_11: C1.1 C3.2 C4.1 C5.1 C6.1 C9.1 C11.1 C12.1 C13.1 C14.1 C15.1 C16.2 D5.A D9.A D13.A D14.A D18.A D19.C P1.5 P3.22 Q1.2 Q5.2 Q6.2 Q8.2 Q10.2 Q11.2 Q12.2 Q13.2 Q14.2 R6.1 R9.2 R10.1 R15.1 R16.1 R47.1 R48.1 R51.1 U3.3 U4.2 U5.2 U6.8 U10.7 U12.8 U13.7 U13.10 U14.1 U16.7 VR1.1 VR1.2
IO_12: P1.6 R30.1
IO_13: D6.C D8.C P1.7 P3.9 U4.1
IO_14: P1.8
IO_15: P1.9 U2.1 U2.5
IO_16: D7.C D10.A P1.10 U2.6
NetC1_2: C1.2 D2.C D3.C Q4.1 R9.1
NetC2_1: C2.1 R7.1 U1.3
NetC2_2: C2.2 Q6.1 R7.2
NetC3_1: C3.1 D11.C Q7.1 R6.2
NetC4_2: C4.2 R8.2 R14.2
NetC5_2: C5.2 R11.1 R12.1
NetC6_2: C6.2 Q10.1 R13.1 R15.2
NetC7_1: C7.1 D14.C R18.1 R19.1
NetC7_2: C7.2 R18.2 R20.2
NetC8_1: C8.1 D13.C R21.2 R24.2
NetC8_2: C8.2 R21.1 R22.2
NetC10_1: C10.1 R30.2
NetC12_2: C12.2 R43.2 R44.2 U14.2 U14.6
NetC13_2: C13.2 Q11.1 R46.2 R47.2
NetC16_1: C16.1 Q13.1 R51.2 R52.1
NetD1_A: D1.A D4.C
NetD1_C: D1.C R5.1
NetD2_A: D2.A D5.C Q6.3 R4.1
NetD3_A: D3.A R3.1
NetD4_A: D4.A D9.C R10.2 U1.2
NetD6_A: D6.A Q2.2
NetD7_A: D7.A D8.A Q3.2
NetD10_C: D10.C R13.2
NetD11_A: D11.A D12.C
NetD12_A: D12.A R16.2 R17.2
NetD15_A: D15.A R17.1
NetD15_C: D15.C D16.A D17.A R23.2
NetD20_A: D20.A D21.C R27.2 U3.6
NetD20_C: D20.C D23.C D24.C
NetD21_A: D21.A D22.A D23.A
NetD25_C: D25.C R42.2
NetD26_C: D26.C R43.1
NetD29_C: D29.C U6.12
NetD30_C: D30.C U6.15
NetD31_A: D31.A Q13.3 R50.1
NetQ1_1: Q1.1 R12.2
NetQ1_3: Q1.3 Q2.1 R1.2
NetQ4_2: Q4.2 R8.1
NetQ5_1: Q5.1 R14.1
NetQ7_2: Q7.2 R11.2
NetQ8_1: Q8.1 Q11.3 R45.1
NetQ8_3: Q8.3 U14.4
NetQ9_1: Q9.1 R19.2
NetQ9_2: Q9.2 R25.2
NetQ9_3: Q9.3 VR1.3
NetQ10_3: Q10.3 U2.8
NetQ12_1: Q12.1 R48.2 R49.1
NetQ12_3: Q12.3 U15.1
NetQ14_1: Q14.1 R53.1
NetQ14_3: Q14.3 R54.1
NetR24_1: R24.1 R26.2
NetR29_2: R29.2 U4.4
NetR31_1: R31.1 U4.6
NetR31_2: R31.2 U5.1
NetR32_1: R32.1 R33.1 R34.1 R35.1 U12.4
NetR32_2: R32.2 U5.3
NetR33_2: R33.2 U7.4
NetR34_2: R34.2 U8.3
NetR35_2: R35.2 R36.2 U12.2
NetR36_1: R36.1 U9.3
NetR37_2: R37.2 U7.2
NetR38_2: R38.2 U8.2
NetR39_2: R39.2 U9.2
NetU14_7: U14.7 U15.6
PAD_02: P3.21
PAD_03: P3.20
PAD_04: P3.19 U15.3
PAD_05: C11.2 P3.18 U3.7 U5.4 U8.4 U9.4
PAD_06: C9.2 P3.17 R25.1 U3.4 U4.3 U7.3
PAD_07: P3.15 P3.16 R28.1
pad_08: P3.13 P3.14 Q2.3 Q3.3 Q4.3 Q7.3 R1.1 R2.2 R3.2 R4.2 R45.2 R50.2 R55.2 U1.1 U1.8 U1.9 U1.12 U1.13 U1.14 U6.1 U7.1 U8.1 U9.1 U10.14 U13.14 U14.8 U15.2 U16.14
PAD_09: P3.11 P3.12 U1.5 U1.6 U1.7
PAD_10: P3.10
PAD_12: P3.8
PAD_13: D16.C D17.C P3.6 P3.7 R5.2 R22.1
PAD_14: P3.5 R23.1
PAD_15: P3.4 R20.1
PAD_16: P3.3 U2.3
PAD_18: P3.1 U2.4
U10_10: R53.2 U10.10
U13_4: C15.2 D29.A U13.4 U16.8 U16.12
U13_5: D27.A U10.5 U10.11 U13.5
U13_06: R55.1 U13.6 U13.11
U13_09: R40.1 R41.1 U12.7 U13.9
X1: Q3.1 Q5.3 R2.1
x2: C10.2 D18.C D19.A D22.C D24.A R26.1 R27.1 R28.2 R29.1 U3.2
x3: U4.5 U6.2
x4: R39.1 U6.4 U10.1
x5: R38.1 U10.3
x6: R37.1 U6.3 U10.4
x7: R40.2 R42.1 U13.8
x8: D25.A U6.6
x9: D27.C D28.C R49.2 U6.7 U10.8 U10.9
x11: D28.A U6.10
x12: C14.2 D30.A U13.2 U16.2 U16.6
pads on no net: D31.C P3.2 R54.2 U1.4 U1.10 U1.11 U2.2 U2.7 U3.1 U3.5 U3.8 U6.13 U6.16 U10.6 U12.3 U12.6 U13.12 U14.5 U16.1 U16.3 U16.4 U16.10 U16.11 U16.13

## Keep-outs
Keep-Out Layer:
  lines w0.5: 25.59,30.988 25.971,30.988 35.369,30.988 35.369,25.781 39.56,21.59 198.183,21.59 198.183,125.984 39.688,125.984 35.496,121.793 35.496,118.872 25.59,118.872 25.59,30.988

## Text inside footprints (layer, text, board x,y; h text height)
P3: Top Overlay "1" at 39.53,117.657 h0.8